# Altium PCB driver_lift_pcb.PcbDoc (part 1 of 2)
Units mm, origin at the board's own origin, x right, y up, seen from the top; angles counter-clockwise.
Board outline 100.2 x 76.58 mm, 2 copper layers (Top Layer, Bottom Layer); 113 components, 100 nets, 427 pads, 166 vias.
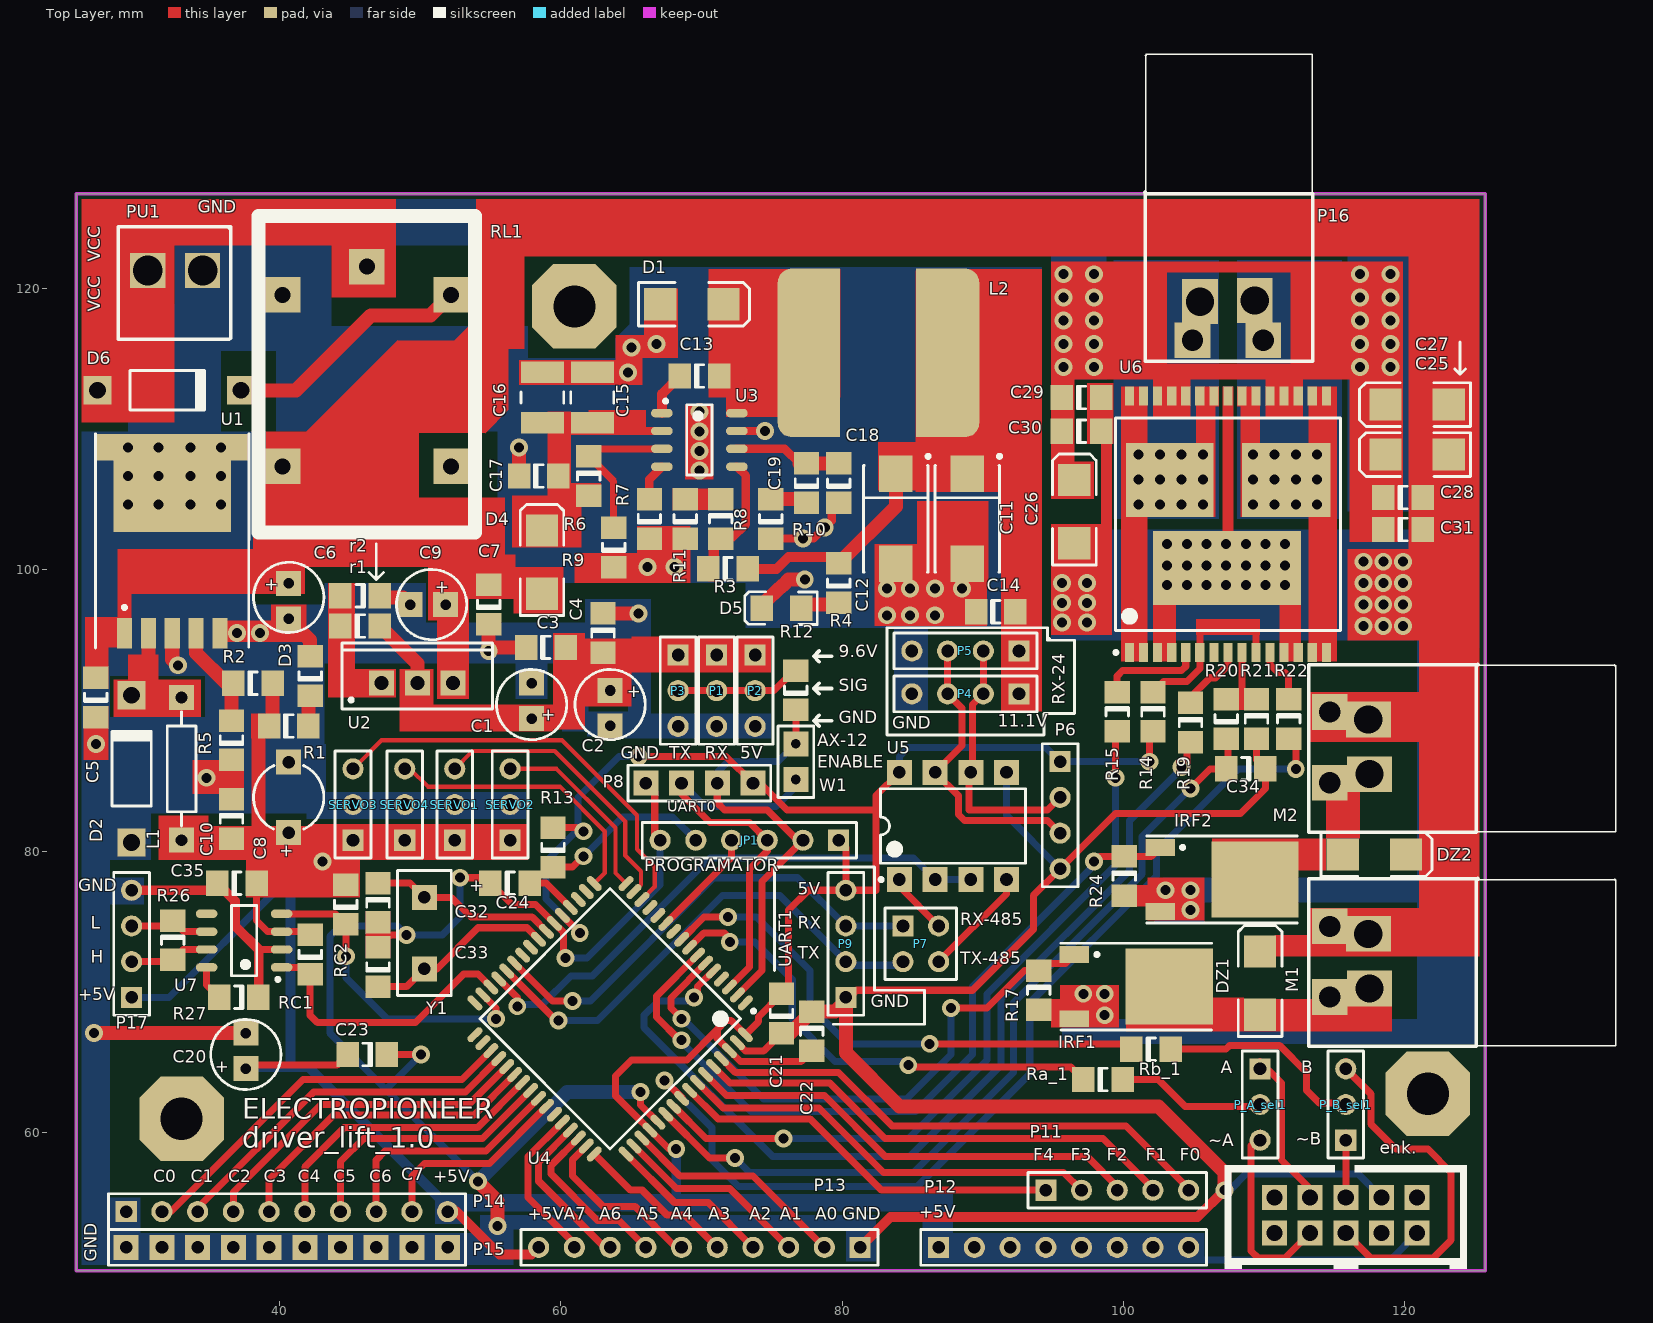
[diagram p0: Top Layer view]
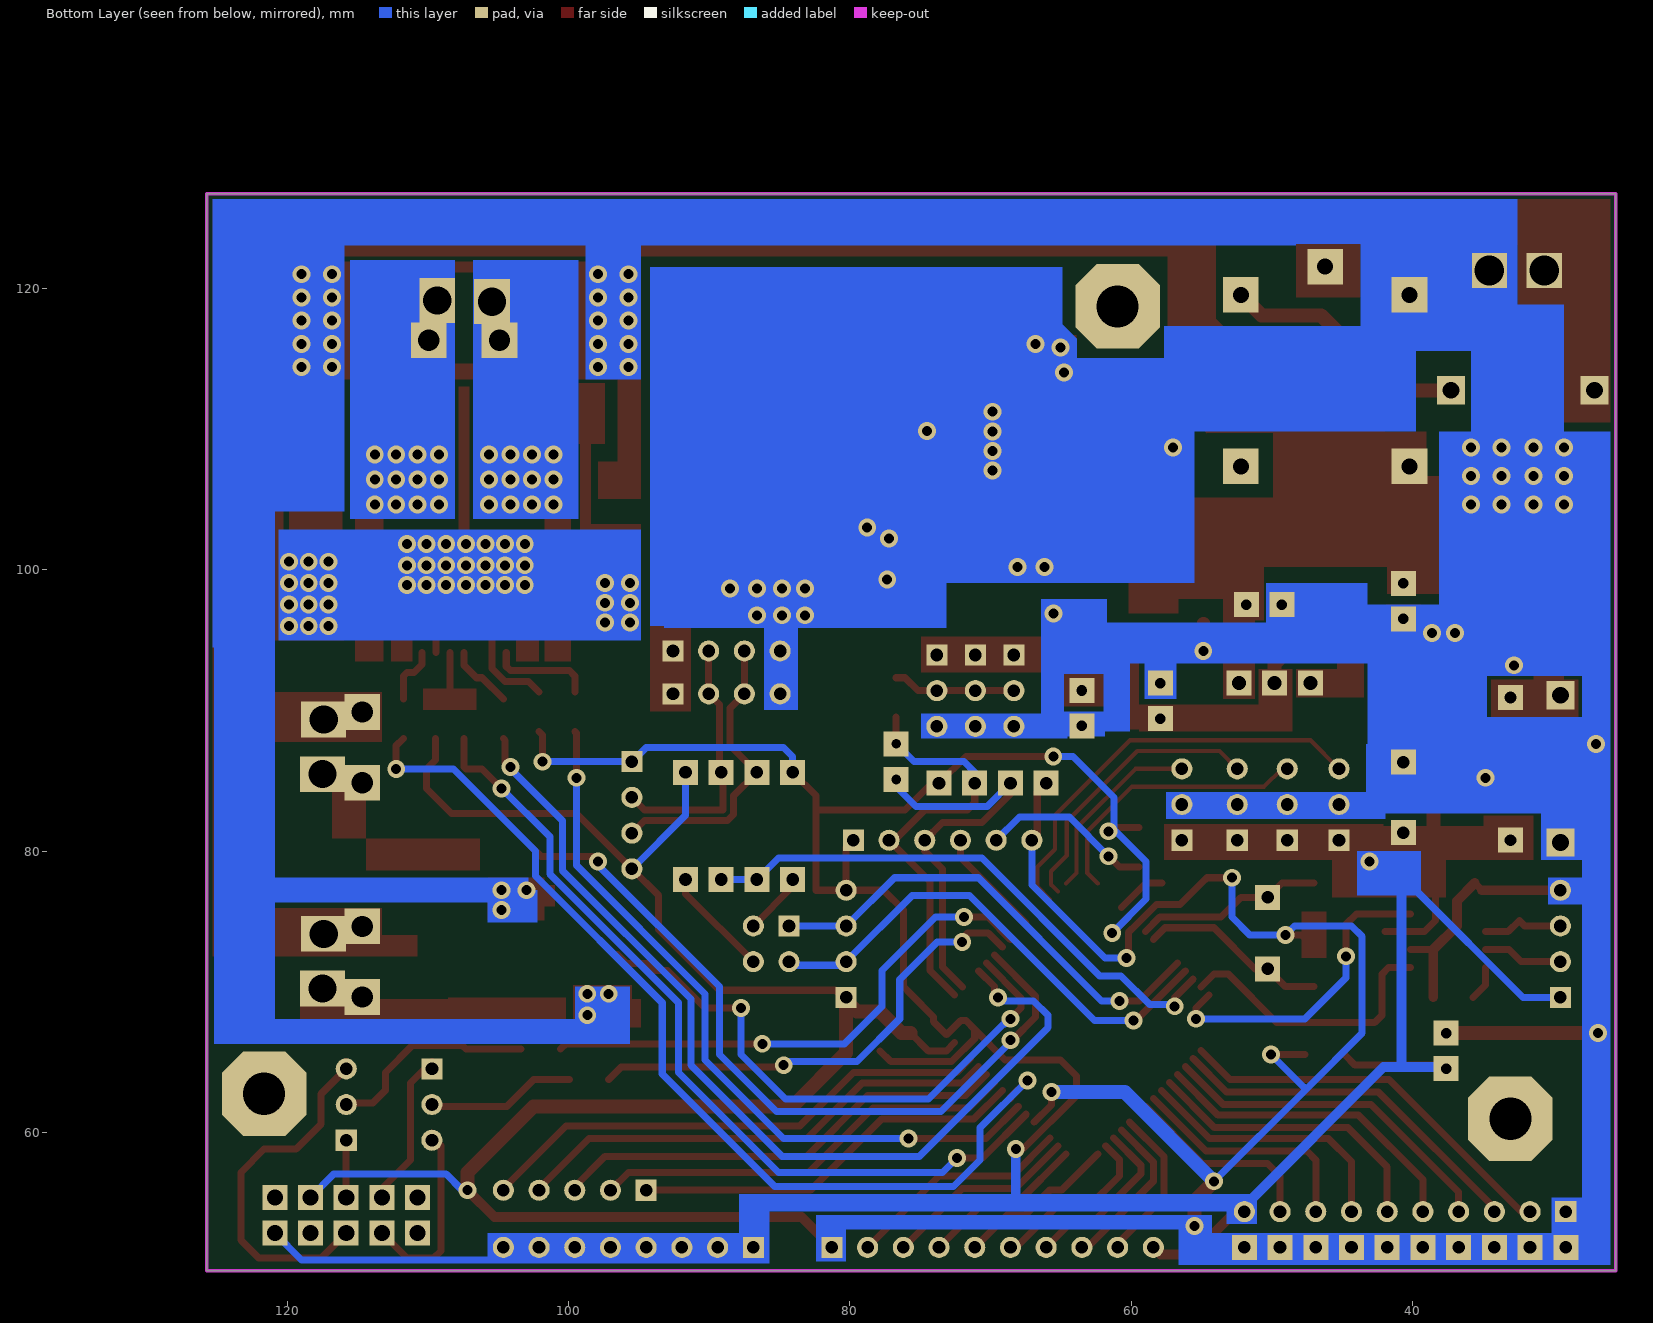
[diagram p1: Bottom Layer view, seen from below]

## Layer stack, top to bottom
Top Layer: signal copper 0.0356
Dielectric: dielectric 0.32, FR-4, Dk 4.8
Bottom Layer: signal copper 0.0356

## Board outline
25.527,50.165 125.73,50.165 125.73,126.746 25.527,126.746

## Design rules (kind name [scope] priority, off if disabled: settings)
Clearance [All] p1: gap=0.254
ComponentClearance [All] p1 off: gap=0.254 collisioncheckmode=3 verticalgap=0.254 showdistances=FALSE
DiffPairsRouting [All] p1: maxlimit=0.254 minlimit=0.254 mostfreqgap=0.254 maxuncoupledlength=12.7
Height [All] p1 off: minheight=0 maxheight=25.4 prefheight=12.7
HoleSize [All] p1: absolutevalues=TRUE maxlimit=5 minlimit=0.025 maxpercent=80.000 minpercent=20.000
HoleToHoleClearance [All] p1: gap=0.1 allowstackedmicrovias=TRUE
MinimumSolderMaskSliver [All] p1: minsoldermaskwidth=0.05
PasteMaskExpansion [All] p1 off: expansion=0
PlaneConnect [All] p1: planeconnectstyle=Direct reliefexpansion=0.508 reliefentries=4 reliefconductorwidth=0.254 reliefairgap=0.254
PolygonConnect [All] p1: connectstyle=Direct reliefconductorwidth=0.254 reliefentries=4 polygonreliefangle="90 Angle"
RoutingVias [All] p1: holewidth=0.711 width=1.27 viastyle="Through Hole" minholewidth=0.711 minwidth=1.27 maxholewidth=0.711 maxwidth=1.27
SilkToSilkClearance [All] p1 off: silktosilkclearance=0.254
SilkscreenOverComponentPads [All] p1 off: minsilkscreentomaskgap=0.254
SolderMaskExpansion [All] p1 off: expansion=0.102
TestPointUsage [All] p1: valid=0 allowmultiple=FALSE
Testpoint [All] p1: side=3 testpointundercomponent=TRUE minsize=1.016 maxsize=2.54 preferedsize=1.524 minholesize=0 maxholesize=1.016 preferedholesize=0.813 testpointgrid=0.025 style=297 order=0-112345678
Width [All] p1: maxlimit=5 minlimit=0.254 preferedwidth=0.508
14 further rules are at their usual default settings.

## Classes and differential pairs
differential pair D: +D_P -D_N

## Components (designator, comment, footprint, x,y, rotation, side; value= is the part's Value field where it differs from the comment)
C1 "Cap Pol1" B 57.912,90.424 r90 top locked
C2 "Cap Pol1" B 63.5,90.424 r270 top locked
C3 "Cap" 1206 58.928,94.488 r0 top locked
C4 "Cap" 1206 62.992,95.504 r270 top locked
C5 "100nF" 1206 26.924,90.932 r90 top locked
C6 "100uF" B 40.64,98.044 r270 top locked
C7 "Cap" 1206 54.864,97.536 r90 top locked
C8 "470uF" CAPPR5-5x5 40.64,83.82 r90 top locked
C9 "100uF" B 50.8,97.536 r180 top locked
C10 "100nF" 1206 36.576,82.296 r270 top locked
C11 "CapTantalum" TC7343-2917 88.9,103.632 r270 top locked
C12 "Cap Pol2" TC7343-2917 83.82,103.632 r270 top locked
C13 "cap_smd1206" 1206_cap 69.85,113.792 r180 top locked
C14 "cap_smd1206" 1206_cap 90.932,97.028 r180 top locked
C15 "cap-smd1812" cap_smd1812 62.23,112.268 r270 top locked
C16 "cap-smd1812" cap_smd1812 58.674,112.268 r270 top locked
C17 "100nF" 1206_cap 58.42,106.68 r180 top locked
C18 "cap_smd1206" 1206_cap 79.756,106.172 r270 top locked
C19 "cap_smd1206" 1206_cap 74.93,103.632 r270 top locked
C20 "100uF" B 37.592,65.532 r90 top locked
C21 "100nF" 1206 75.692,68.453 r90 top locked
C22 "100nF" 1206 77.851,67.183 r270 top locked
C23 "100nF" 1206 46.228,65.532 r180 top locked
C24 "2.2uF" 1206 56.388,77.724 r0 top locked
C25 "ZA MOST1" DSO-C2/X2.3 120.904,108.204 r180 top locked
C26 "ZA MOST1" DSO-C2/X2.3 96.52,104.14 r90 top locked
C27 "ZA MOST1" DSO-C2/X2.3 120.904,111.76 r180 top locked
C28 "Cap" 1206 119.888,105.156 r0 top locked
C29 "Cap" 1206 97.028,112.268 r0 top locked
C30 "Cap" 1206 97.028,109.855 r0 top
C31 "Cap" 1206 119.888,102.87 r0 top
C32 "33pF" 1206 46.99,76.327 r270 top locked
C33 "33pF" 1206 46.99,71.755 r90 top locked
C34 "Cap" 1206 108.712,85.852 r180 top locked
C35 "100nF" 1206 36.957,77.724 r0 top locked
D1 "B360B-13-F" DSO-C2/X3.3 69.342,118.872 r180 top locked
D2 "Diode Shottky" DO-41#1 29.464,85.852 r90 top locked
D3 "LED3" 1206 42.164,92.456 r90 top locked
D4 "B360B-13-F" DSO-C2/X3.3 58.674,100.584 r270 top locked
D5 "LEDsmd" led1206 75.692,97.282 r0 top locked
D6 "1N4007" DO-41#2 32.004,112.776 r0 top locked
DZ1 "STTH2R06U" DSO-C2/X2.3 109.728,70.612 r90 top locked
DZ2 "STTH2R06U" DSO-C2/X2.3 117.856,79.756 r0 top locked
enk. "Header 5X2" box_header 120.904,55.372 r180 top locked (schematic designator P_maxon1)
IRF1 "LR7821 / IRLR120" TO252 96.52,72.644 r270 top locked
IRF2 "LR7821 / IRLR120" TO252 102.616,80.264 r270 top locked
JP1 "programator" HDR1X6 79.756,80.772 r180 top
L1 "Inductor" AXIAL-0.4 33.02,85.852 r270 top locked
L2 "Inductor_MSS1260" INDUCTOR_SS1260-103MLD 82.55,115.824 r180 top locked
M1 "PREKIDAC_02" kombinacija 116.84,72.136 r90 top locked
M2 "PREKIDAC_02" kombinacija 116.84,87.376 r90 top locked
P1 "servo1" HDR1X3 71.074,93.953 r270 top locked
P2 "servo2" HDR1X3 73.814,93.953 r270 top locked
P3 "servo3" HDR1X3 68.334,93.953 r270 top locked
P4 "servo1" HDR1X4#1 92.583,91.186 r180 top locked
P5 "servo2" HDR1X4#1 92.583,94.234 r180 top locked
P6 "RS-485" HDR1X4#1 95.504,86.36 r270 top locked
P7 "Header 2X2" HDR2X2 84.328,74.676 r270 top locked
P8 "UART0" HDR1X4#2 66.04,84.836 r0 top locked
P9 "UART1" HDR1X4#1 80.264,69.596 r90 top locked
P11 "Header 5" HDR1X5 94.488,55.88 r0 top locked
P12 "Header 8" HDR1X8 86.868,51.816 r0 top locked
P13 "Header 10" HDR1X10#1 81.28,51.816 r180 top locked
P14 "Header 10" HDR1X10#1 29.083,54.356 r0 top locked
P15 "Header 10" HDR1X10#2 51.943,51.816 r180 top locked
P16 "MOTOR1" kombinacija 107.442,118.491 r180 top locked
P17 "CANBUS" HDR1X4#1 29.464,69.596 r90 top locked
P_A_sel1 "Header 3" HDR1X3 109.728,64.516 r270 top locked
P_B_sel1 "Header 3" HDR1X3 115.824,59.436 r90 top locked
PU1 "Header 2" kon-zakacaljkax2 32.512,120.396 r0 top locked
R1 "1k" 1206 40.64,88.9 r0 top locked
r1 "Res1" 1206 45.72,96.012 r0 top locked
R2 "8k2" 1206 38.1,91.948 r0 top locked
r2 "Res1" 1206 45.72,98.171 r180 top locked
R3 "res" 1206_res 71.882,100.076 r180 top locked
R4 "res" 1206_res 79.756,99.06 r270 top locked
R5 "2k7" 1206 36.576,87.884 r90 top locked
R6 "res" 1206_res 61.976,106.68 r90 top locked
R7 "res" 1206_res 66.294,103.632 r270 top locked
R8 "res" 1206_res 71.374,103.632 r90 top locked
R9 "res" 1206_res 63.754,101.6 r270 top locked
R10 "res" 1206_res 77.47,106.172 r270 top locked
R11 "res" 1206_res 68.834,103.632 r270 top locked
R12 "Res2" 1206 76.708,91.44 r90 top locked
R13 "33k" 1206 59.436,80.264 r90 top locked
R14 "res" 1206 102.108,89.916 r270 top locked
R15 "res" 1206 99.568,89.916 r270 top locked
R17 "Res2" 1206 93.98,70.104 r270 top locked
R19 "res" 1206 104.775,89.154 r270 top locked
R20 "res" 1206 107.315,89.408 r90 top locked
R21 "res" 1206 109.474,89.408 r270 top locked
R22 "res" 1206 111.76,89.408 r270 top locked
R24 "Res2" 1206 100.076,78.232 r270 top locked
R26 "termination" 1206 32.385,73.66 r270 top locked
R27 "50k" 1206 37.084,69.596 r180 top locked
Ra_1 "1k" 1206 98.552,63.754 r0 top locked
Rb_1 "1k" 1206 101.981,65.913 r0 top
RC1 "1K" 1206 42.164,72.644 r90 top locked
RC2 "1k" 1206 44.704,76.2 r90 top locked
RL1 "Relay_1" "RELEJ SMRDLJIVI" 31.496,137.668 r270 top locked
SERVO1 "Header 3" HDR1X3 52.451,80.772 r90 top locked
SERVO2 "Header 3" HDR1X3 56.388,80.772 r90 top locked
SERVO3 "Header 3" HDR1X3 45.212,80.772 r90 top locked
SERVO4 "Header 3" HDR1X3 48.895,80.772 r90 top locked
U1 "LM2575HVT-ADJ" TO-263(5) 28.956,95.504 r0 top locked
U2 "LM350T" T03B 49.784,91.948 r0 top locked
U3 "TPS54340" SOIC_8PIN 69.85,109.22 r90 top locked
U4 "AT90CAN128-16AU" TQFP80P1600X1600X110-64L 63.5,68.072 r225 top locked
U5 "MAX485EPA" DIP-8 87.884,81.788 r90 top locked
U6 "VNH2SP30-E" vnh_test1 107.442,103.251 r90 top locked
U7 "MCP2551-I/P" SOIC_8PIN 37.465,73.66 r270 top locked
W1 "Jumper" RAD-0.1 76.708,86.36 r270 top locked
Y1 "11.059200MHz" RAD-0.2 50.292,74.168 r90 top locked

## Footprints (in the part's own frame and the unit in brackets; to place one, negate y for a bottom-side part, rotate by r counter-clockwise, add the part's x,y. Pads: shape width x height; smd on the part's side, far side on the other; paste and mask are expansions set on the pad)
1206 [mm]
  rect 1.6x1.8 smd: 1(-1.4,0) 2(1.4,0)
  silkscreen extent -0.3,-0.8 0.3,0.8
1206_cap [mm]
  rect 1.6x1.8 smd: 1(1.4,0) 2(-1.4,0)
  silkscreen extent -0.3,-0.8 0.3,0.8, body extent -1.65,-0.81 1.55,0.79, height 1
1206_res [mm]
  rect 1.6x1.8 smd: 1(1.4,0) 2(-1.4,0)
  silkscreen extent -0.3,-0.8 0.3,0.8, body extent -1.63,-0.81 1.57,0.79, height 0.55
AXIAL-0.4 [mil]
  rect 70x70 hole 33.46: 1(-200,0) 2(200,0)
  silkscreen extent -160,-40 160,40
B [mil]
  rect 70x70 hole 29.53: 1(-39.37,0) 2(60,0)
  silkscreen extent -98,-98 98,98
box_header [mil]
  rect 70x70 hole 45: 1(400,100) 2(400,0) 3(300,100) 4(300,0) 5(200,100) 6(200,0) 7(100,100) 8(100,0) 9(0,100) 10(0,0)
  silkscreen extent -140,-90 540,200
cap_smd1812 [mil]
  rect 60x120 smd: 1(71.02,1) 2(-71.02,1)
  silkscreen extent -16,-60 16,60, body extent -89,-62 88,64, height 40
CAPPR5-5x5 [mil]
  rect 70x70 hole 35: 1(-98.43,0) 2(98.43,0)
  silkscreen extent -89,-98 89,98
DIP-8 [mil]
  rect 70x70 hole 35.43: 1(-150,150) 2(-150,50) 3(-150,-50) 4(-150,-150) 5(150,-150) 6(150,-50) 7(150,50) 8(150,150)
  silkscreen extent -155,-203 104,206, body extent -142,-203 142,203, height 200
DO-41#1 [mm]
  rect 2x2 hole 1.2: 1(-5.23,0) 2(5.23,0)
  silkscreen extent -2.65,-1.4 2.75,1.4
DO-41#2 [mm]
  rect 2x2 hole 1.2: 1(-4.953,0) 2(5.23,0)
  silkscreen extent -2.65,-1.4 2.75,1.42
DSO-C2/X2.3 [mm]
  rect 2.3x2.3 smd: 1(-2.25,0) 2(2.25,0)
  silkscreen extent -3.8,-1.55 4.1,1.55
DSO-C2/X3.3 [mm]
  rect 2.3x2.3 smd: 1(2.275,-0.022) 2(-2.225,-0.022)
  silkscreen extent -4.07,-1.57 3.83,1.53, body extent -2.72,-2.03 2.78,1.87, height 2.45
HDR1X3 [mm] "Connector; Header; 3 Position"
  rect 1.5x1.5 hole 0.9: 1(0,0)
  round 1.5 hole 0.9: 2(2.54,0) 3(5.08,0)
  silkscreen extent -1.27,-1.27 6.35,1.27
HDR1X4#1 [mm] "Connector; Header; 4 Position"
  rect 1.5x1.5 hole 0.9: 1(0,0)
  round 1.5 hole 0.9: 2(2.54,0) 3(5.08,0) 4(7.62,0)
  silkscreen extent -1.27,-1.27 8.89,1.27
HDR1X4#2 [mm]
  rect 1.778x1.778 hole 0.9: 1(0,0) 2(2.54,0) 3(5.08,0) 4(7.62,0)
  silkscreen extent -1.27,-1.27 8.89,1.27
HDR1X5 [mm] "Connector; Header; 5 Position"
  rect 1.5x1.5 hole 0.9: 1(0,0)
  round 1.5 hole 0.9: 2(2.54,0) 3(5.08,0) 4(7.62,0) 5(10.16,0)
  silkscreen extent -1.27,-1.27 11.43,1.27
HDR1X6 [mm] "Connector; Header; 6 Position"
  rect 1.5x1.5 hole 0.9: 1(0,0)
  round 1.5 hole 0.9: 2(2.54,0) 3(5.08,0) 4(7.62,0) 5(10.16,0) 6(12.7,0)
  silkscreen extent -1.27,-1.27 13.97,1.27
HDR1X8 [mm] "Connector; Header; 8 Position"
  rect 1.5x1.5 hole 0.9: 1(0,0)
  round 1.5 hole 0.9: 2(2.54,0) 3(5.08,0) 4(7.62,0) 5(10.16,0) 6(12.7,0) 7(15.24,0) 8(17.78,0)
  silkscreen extent -1.27,-1.27 19.05,1.27
HDR1X10#1 [mm] "Connector; Header; 10 Position"
  rect 1.5x1.5 hole 0.9: 1(0,0)
  round 1.5 hole 0.9: 2(2.54,0) 3(5.08,0) 4(7.62,0) 5(10.16,0) 6(12.7,0) 7(15.24,0) 8(17.78,0) 9(20.32,0) 10(22.86,0)
  silkscreen extent -1.27,-1.27 24.13,1.27
HDR1X10#2 [mm]
  rect 1.778x1.778 hole 0.9: 1(0,0) 2(2.54,0) 3(5.08,0) 4(7.62,0) 5(10.16,0) 6(12.7,0) 7(15.24,0) 8(17.78,0) 9(20.32,0) 10(22.86,0)
  silkscreen extent -1.27,-1.27 24.13,1.27
HDR2X2 [mm] "Connector; Header; 2x2 Position"
  rect 1.5x1.5 hole 0.9: 1(0,0)
  round 1.5 hole 0.9: 2(0,2.54) 3(2.54,0) 4(2.54,2.54)
  silkscreen extent -1.27,-1.27 3.81,3.81
INDUCTOR_SS1260-103MLD [mil]
  rect 75x472.44 smd: 1(144,15) 2(-144,15)
  rrect50% 157.48x472.44 smd: 1(202,15) 2(-205,15)
  body extent -247,-231 245,261, height 315
kombinacija [mil]
  rect 100x100 hole 59.06: 1(-99,85) 2(99,85)
  rect 100x125.98 hole 78.74: 1(-75,-26) 2(78,-23)
  silkscreen extent -237,-716 233,144
kon-zakacaljkax2 [mm]
  rect 2.5x2.5 hole 2.1: 1(-1.9,0.9) 2(2,0.9)
  silkscreen extent -4,-4 4,4
led1206 [mm]
  rect 1.6x1.8 smd: 1(1.4,0) 2(-1.4,0)
  silkscreen extent -2.62,-1.17 2.54,1.17, body extent -1.6,-0.79 1.6,0.81, height 1.11
RAD-0.1 [mil]
  rect 70x70 hole 27.56: 1(-50,0) 2(50,0)
  silkscreen extent -100,-50 100,50
RAD-0.2 [mil]
  rect 70x70 hole 35: 1(-100,0) 2(100,0)
  silkscreen extent -175,-75 175,75
"RELEJ SMRDLJIVI" [mm]
  rect 2.54x2.54 hole 1.143: 1(16.1,14.7) 2(30.3,8.7) 3(30.3,20.7) 4(18.1,20.7) 5(18.1,8.7)
  silkscreen extent 12.5,7 35,22.4
SOIC_8PIN [mil]
  oval 23.62x60.61 smd: 1(76,105) 2(26,105) 3(-24,105) 4(-74,105) 5(-74,-105) 6(-24,-105) 7(26,-105) 8(76,-105)
  silkscreen extent -97,-35 114,99, body extent -96,-123 97,113, height 69
T03B [mil]
  rect 70x70 hole 39.37: 1(-100,0) 2(0,0) 3(100,0)
  silkscreen extent -211,-73 211,112, body extent -213,-75 213,114, height 764
TC7343-2917 [mm]
  rect 2.6x2.4 smd: 1(-3.2,0) 2(3.2,0)
  silkscreen extent -4.57,-2.3 3.8,2.43, body extent -3.18,-1.63 3.01,1.58, height 2.68
TO252 [mm]
  rect 1.2x2.1 smd: 1(0,0) 3(4.57,0)
  rect 5.4x6.2 smd: 4(2.285,6.75)
  silkscreen extent -0.8,-0.95 5.37,9.75, body extent -0.98,-0.64 5.56,9.3, height 2.29
TO-263(5) [mm]
  rect 1.07x2.16 smd: 1(0,0) 2(1.7,0) 3(3.4,0) 4(5.1,0) 5(6.8,0)
  rect 8.33x6.99 smd: 3(3.4,10.675)
  rect 10.8x1.91 smd: 3(3.4,13.215)
  silkscreen extent -2.06,-1.05 8.85,14.18
TQFP80P1600X1600X110-64L [mm] "TQFP, 64-Leads, Body 16.0x16.0mm (max), Pitch 0.80mm, IPC High Density"
  oval 1.3x0.5 smd: 1(-7.6,6) 2(-7.6,5.2) 3(-7.6,4.4) 4(-7.6,3.6) 5(-7.6,2.8) 6(-7.6,2) 7(-7.6,1.2) 8(-7.6,0.4) 9(-7.6,-0.4) 10(-7.6,-1.2) 11(-7.6,-2) 12(-7.6,-2.8) 13(-7.6,-3.6) 14(-7.6,-4.4) 15(-7.6,-5.2) 16(-7.6,-6) 33(7.6,-6) 34(7.6,-5.2) 35(7.6,-4.4) 36(7.6,-3.6) 37(7.6,-2.8) 38(7.6,-2) 39(7.6,-1.2) 40(7.6,-0.4) 41(7.6,0.4) 42(7.6,1.2) 43(7.6,2) 44(7.6,2.8) 45(7.6,3.6) 46(7.6,4.4) 47(7.6,5.2) 48(7.6,6)
  oval 0.5x1.3 smd: 17(-6,-7.6) 18(-5.2,-7.6) 19(-4.4,-7.6) 20(-3.6,-7.6) 21(-2.8,-7.6) 22(-2,-7.6) 23(-1.2,-7.6) 24(-0.4,-7.6) 25(0.4,-7.6) 26(1.2,-7.6) 27(2,-7.6) 28(2.8,-7.6) 29(3.6,-7.6) 30(4.4,-7.6) 31(5.2,-7.6) 32(6,-7.6) 49(6,7.6) 50(5.2,7.6) 51(4.4,7.6) 52(3.6,7.6) 53(2.8,7.6) 54(2,7.6) 55(1.2,7.6) 56(0.4,7.6) 57(-0.4,7.6) 58(-1.2,7.6) 59(-2,7.6) 60(-2.8,7.6) 61(-3.6,7.6) 62(-4.4,7.6) 63(-5.2,7.6) 64(-6,7.6)
  silkscreen extent -7.72,-6.55 6.55,6.95, body extent -7,-7 7,7, height 1.1
vnh_test1 [mm]
  rect 1.35x0.65 smd: 1(-9.125,7) 2(-9.125,6) 3(-9.125,5) 4(-9.125,4) 5(-9.125,3) 6(-9.125,2) 7(-9.125,1) 8(-9.125,0) 9(-9.125,-1) 10(-9.125,-2) 11(-9.125,-3) 12(-9.125,-4) 13(-9.125,-5) 14(-9.125,-6) 15(-9.125,-7) 16(9.125,-7) 17(9.125,-6) 18(9.125,-5) 19(9.125,-4) 20(9.125,-3) 21(9.125,-2) 22(9.125,-1) 23(9.125,0) 24(9.125,1) 25(9.125,2) 26(9.125,3) 27(9.125,4) 28(9.125,5) 29(9.125,6) 30(9.125,7)
  rect 5.25x10.5 smd: 31(-3.117,0.064)
  rect 5.26x6.23 smd: 32(3.146,4.133)
  rect 5.25x6.3 smd: 33(3.144,-4.156)
  silkscreen extent -9.25,-8 7.55,8.1

## Part data
C1 C2 C11: "Polarized Capacitor (Radial)"
C3 C4 C7 C13 C14 C18 C19 C28 C29 C30 C31 C34: "Capacitor"
C5 C10 C21 C22 C23 C24 C32 C33 C35: library part Cap, "Capacitor"
C6 C8 C9 C20 C25 C26 C27: library part "Cap Pol1", "Polarized Capacitor (Radial)"
C12 C15 C16: "Polarized Capacitor (Axial)"
C17: library part cap_smd, "Capacitor"
D1 D4: library part SCHOTTKY_RECTIFIER_diode_SMB, "Schottky Rectifier"
D2 D6: library part "Diode 1N4007", "1 Amp General Purpose Rectifier"
D3: "Typical BLUE SiC LED"
D5: "Typical INFRARED GaAs LED"
DZ1 DZ2: library part Diode, "Default Diode"
enk.: "Header, 5-Pin, Dual row"
IRF1 IRF2: library part IRLR120, "HEXFET N-Channel Power MOSFET"
JP1: library part "Header 6", "Header, 6-Pin"
L2: "Magnetic-Core Inductor"
M1 M2 P16: library part "Header 2", "Header, 2-Pin"
P1 P2 P3: library part "Header 3", "Header, 3-Pin"
P4 P5 P6 P8 P9 P17: library part "Header 4", "Header, 4-Pin"
P7: "Header, 2-Pin, Dual row"
P11: "Header, 5-Pin"
P12: "Header, 8-Pin"
P13 P14 P15: "Header, 10-Pin"
P_A_sel1 P_B_sel1 SERVO1 SERVO2 SERVO3 SERVO4: "Header, 3-Pin"
PU1: "Header, 2-Pin"
R1 R2 R5 R13 R26 R27 RC1 RC2: library part Res2, "Resistor"
r1 r2 R3 R4 R6 R7 R8 R9 R10 R11 R12 R17 R24: "Resistor"
R14 R15 R19 R20 R21 R22: library part Res1, "Resistor"
Ra_1 Rb_1: library part RES1
U1: "Simple Switcher 1A Step Down Voltage Regulator"
U2: "3-Amp Adjustable Regulator"
U3: "Buck Step Down Regulator with 5.5 to 36 V Input and 1.23 to 31 V Output, -40 to 125 degC, 8-Pin SOIC (D), Green (RoHS & no Sb/Br)"
U4: "8-bit AVR Microcontroller, 128KB Flash and CAN Controller, 53 GPIO pins, Industrial Grade (-40° to +85°C), 64-pin LQFP, Green"
U5: "Low-Power, Slew-Rate-Limited RS-485/RS-422 Transceiver"
U7: "High Speed CAN Transceiver, 8-Pin Plastic DIP, Industrial Grade"
W1: "Jumper Wire"
Y1: library part XTAL, "Crystal Oscillator"

## Free pads (board coordinates)
  oct 6x6 hole 3: 0(33.02,60.96) 0(60.96,118.745) 0(121.666,62.738)

## Via types
v1: diameter 1.27, hole 0.711, Top Layer to Bottom Layer, tented both sides, 166 vias

## Nets (pads, with @x,y where several pads share a name; then routed paths per layer and width w, separated by ;. In a path a pad name is that pad's centre, name@x,y a point inside that pad or via, vN(x,y) a via of type N, cw(c..) or ccw(c..) an arc to the next point about the centre after c; other vN are vias at no path point)
+5: C8.1 C10.2 C20.1 C21.2 C22.2 C23.2 C35.2 enk..9 JP1.1 L1.2 P6.1 P8.4 P9.4 P12.1 P12.2 P12.3 P12.4 P12.5 P12.6 P12.7 P12.8 P13.10 P14.10 P17.1 R1.1 R2.2 R13.2 R14.2 RC1.2 RC2.2 SERVO1.1 SERVO2.1 SERVO3.1 SERVO4.1 U4.21 U4.52 U4.62 U4.64 U5.8 U7.3 | length 219.4
  Top Layer w0.5: C20.1@37.592,64.532 37.83,64.77 44.066,64.77 C23.2@44.828,65.532 ; C35.2@38.357,77.724 38.357,75.054 39.141,74.27 U7.3@40.132,74.27 RC1.2@41.938,74.27 ; R13.2@59.941,81.664 R13.2@59.436,81.664 61.084,81.664 61.341,81.407 v1(61.595,81.407) ; U4.21@60.106,75.426 60.106,75.403 v1(61.341,74.168) ; v1(65.532,86.741) 71.755,86.741 P8.4@73.66,84.836 74.168,84.836 76.073,82.931 82.423,82.931 ; v1(68.199,58.801) 67.68,58.801 63.881,62.6 63.881,64.008 65.024,65.151 68.961,65.151 71.12,67.31 ; C22.2@77.851,65.783 77.092,65.024 72.771,65.024 71.12,66.675 71.12,67.31 ; JP1.1@79.756,80.772 80.264,80.264 P9.4@80.264,77.216 ; U5.8@84.074,85.598 82.423,83.947 82.423,82.931 ; v1(101.854,86.36) 101.854,88.262 R14.2@102.108,88.516 ; 71.12,67.31 71.755,67.945 72.112,67.945 U4.64@73.117,66.941 74.041,67.865 74.041,68.202 C21.2@75.692,69.853 76.2,70.361 76.2,75.819 77.597,77.216 P9.4@80.264,77.216 ; P9.4@80.264,77.216 82.423,77.216 82.423,82.931
  Top Layer w0.7: P14.10@51.943,54.356 52.578,54.356 55.626,51.308 57.912,51.308 P13.10@58.42,51.816
  Top Layer w1: 38.481,80.772 R1.1@38.481,88.9 ; R1.1@39.24,88.9 39.5,89.16 R2.2@39.5,91.948 R2.2@39.5,91.316
  Bottom Layer w0.5: P17.1@29.464,69.596 32.131,69.596 39.751,77.216 ; P14.10@51.943,54.356 P14.10@51.943,54.737 ; v1(61.341,74.168) 58.928,76.581 58.928,79.248 61.214,81.534 61.214,83.82 64.135,86.741 v1(65.532,86.741) ; U5.8@84.074,85.598 84.074,86.741 84.709,87.376 94.488,87.376 P6.1@95.504,86.36 v1(101.854,86.36) ; P12.8@104.648,51.816 105.537,50.927 118.999,50.927 enk..9@120.904,52.832
  Bottom Layer w0.7: C20.1@37.592,64.532 37.703,64.643 40.767,64.643 ; 40.64,77.597 40.767,77.47 40.767,64.643 ; P14.10@51.943,54.737 42.037,64.643 40.767,64.643 ; 68.199,54.991 v1(68.199,58.801)
  other v1: 43.053,79.248
+9.6V: C1.1 C2.1 C3.2 C4.2 P1.1 P2.1 P3.1 r1.2 U2.2 | length 5.2
  Top Layer w1: r1.2@47.12,96.012 49.784,93.348 U2.2@49.784,91.948
+12V: C5.2 C6.1 C7.2 C9.1 C25.1 C26.1 C27.1 C28.2 C29.2 C30.2 C31.2 D4.1 DZ1.2 DZ2.2 M1.2 M2.2 RL1.2 U1.1 U2.3 U6.3 U6.4 U6.12 U6.13 U6.23 U6.31 | length 21.9
  Top Layer w1: U1.1@28.956,95.504 28.956,99.441 29.591,100.076 37.719,100.076 38.608,100.965 38.608,104.256 41.72,107.368
  other v1: 117.094,96.012 118.491,96.012 119.888,96.012 95.631,96.266 97.409,96.266 117.094,97.536 118.491,97.536 119.888,97.536 95.631,97.663 97.409,97.663 103.124,98.933 104.521,98.933 105.918,98.933 107.315,98.933 108.712,98.933 110.109,98.933 111.506,98.933 95.631,99.06 97.409,99.06 117.094,99.06 118.491,99.06 119.888,99.06 103.124,100.33 104.521,100.33 105.918,100.33 107.315,100.33 108.712,100.33 110.109,100.33 111.506,100.33 117.094,100.584 118.491,100.584 119.888,100.584 103.124,101.854 104.521,101.854 105.918,101.854 107.315,101.854 108.712,101.854 110.109,101.854 111.506,101.854
A1: enk..4 P_A_sel1.1 | length 11.1
  Top Layer w0.5: P_A_sel1.1@109.728,65.024 111.252,63.5 111.252,58.039 113.284,56.007 enk..4@113.284,55.372
B1: enk..6 P_B_sel1.1 | length 4.6
  Top Layer w0.5: enk..6@115.824,55.372 P_B_sel1.1@115.824,59.944
CANH: P17.2 R26.2 U7.7 | length 5.7
  Top Layer w0.5: P17.2@29.464,72.136 32.261,72.136 R26.2@32.385,72.26 33.125,73 U7.7@34.798,73
CANL: P17.3 R26.1 U7.6 | length 5.8
  Top Layer w0.5: P17.3@29.464,74.676 32.001,74.676 R26.1@32.385,75.06 33.175,74.27 U7.6@34.798,74.27
D_N: P4.2 P5.2 P6.2 U5.6 | length 18.6
  Top Layer w0.5: P5.2@90.043,94.234 P4.2@90.043,91.186 89.281,90.424 89.281,85.725 U5.6@89.154,85.598 89.027,85.471 89.027,82.927 94.611,82.927 P6.2@95.504,83.82
D_P: P4.3 P5.3 P6.3 U5.7 | length 21.3
  Top Layer w0.5: P5.3@87.503,94.234 P4.3@87.503,91.186 88.527,90.162 88.527,87.511 U5.7@86.614,85.598 88.273,83.939 88.273,82.615 88.715,82.173 94.611,82.173 P6.3@95.504,81.28
GND: C1.2 C2.2 C3.1 C4.1 C5.1 C6.2 C7.1 C8.2 C9.2 C10.1 C11.2 C12.2 C14.1 C15.2 C16.2 C17.1 C18.1 C19.1 C20.2 C21.1 C22.1 C23.1 C24.1 C25.2 C26.2 C27.2 C28.1 C29.1 C30.1 C31.1 C32.2 C33.2 C34.1 C35.1 D1.1 D2.1 D3.2 D5.2 enk..8 IRF1.3 IRF2.3 JP1.6 P1.3 P2.3 P3.3 P4.4 P5.4 P6.4 P8.1 P9.1 P13.1 P14.1 P15.1 P15.2 P15.3 P15.4 P15.5 P15.6 P15.7 P15.8 P15.9 P15.10 P17.4 PU1.2 r2.1 R5.1 R7.1 R9.1 R11.1 R17.2 R21.2 R24.2 R27.1 RL1.5 SERVO1.2 SERVO2.2 SERVO3.2 SERVO4.2 U1.3 U1.5 U3.7 U4.22 U4.53 U4.63 U5.5 U6.18 U6.19 U6.20 U6.26 U6.27 U6.28 U7.2 | length 294.3
  Top Layer w0.5: C35.1@35.049,77.216 C35.1@35.557,77.724 ; R27.1@38.484,69.596 R27.1@38.506,69.618 ; 38.506,73 U7.2@40.132,73 ; C33.2@46.99,73.155 47.876,74.041 v1(49.022,74.041) ; C23.1@47.628,65.532 v1(50.038,65.532) ; v1(52.832,78.105) 54.607,78.105 C24.1@54.988,77.724 56.512,76.2 58.2,76.2 U4.22@59.54,74.86 60.198,74.202 60.198,72.517 v1(60.325,72.39) ; v1(65.659,62.865) 65.659,61.953 U4.53@66.894,60.718 ; P8.1@66.04,84.836 66.675,84.201 66.675,81.153 JP1.6@67.056,80.772 ; U4.63@72.551,66.375 73.14,65.786 74.425,65.786 C21.1@75.692,67.053 ; 80.267,67.691 P9.1@80.267,69.345 ; 80.391,67.948 P9.1@80.391,69.469 ; R21.2@109.474,88.008 109.474,86.49 C34.1@110.112,85.852 110.112,84.458 108.331,82.677 99.441,82.677 P6.4@95.504,78.74 93.599,76.835 93.599,74.422 89.281,70.104 81.026,70.104 P9.1@80.391,69.469 ; P9.1@80.267,69.345 80.264,69.342 P9.1@80.264,69.596 P9.1@80.267,69.593 ; P9.1@80.267,69.345 P9.1@80.267,69.593 ; P9.1@80.267,69.345 P9.1@80.391,69.469 ; P9.1@80.267,69.593 P9.1@80.391,69.469
  Top Layer w0.6: U3.7@72.517,109.88 74.168,109.88 v1(74.524,109.88) ; C19.1@74.93,102.232 v1(77.216,102.232) 77.975,102.232 v1(78.767,103.024) 79.248,103.505 C18.1@79.248,104.264
  Top Layer w0.7: P17.4@29.464,77.216 C35.1@35.049,77.216 ; C35.1@35.557,77.724 36.83,76.451 36.83,74.676 38.506,73 R27.1@38.506,69.618 ; P13.1@81.28,51.816 83.439,53.975 105.283,53.975 v1(107.188,55.88)
  Top Layer w1: v1(26.797,67.056) C20.2@37.592,67.056 ; U1.3@32.356,95.504 32.356,93.628 v1(32.766,93.218) ; C6.2@40.64,96.52 42.164,94.996 D3.2@42.164,93.856 ; r2.1@47.12,98.044 48.768,98.044 C9.2@49.276,97.536 ; v1(54.102,56.515) 55.499,55.118 v1(55.499,53.34) ; C7.1@54.864,96.136 54.864,94.488 C3.1@57.528,94.488 ; C17.1@57.02,106.553 v1@57.02,108.455 ; C4.1@62.992,96.904 v1(65.529,96.904) v1@65.532,96.901 ; D5.2@74.292,97.536 75.819,98.933 76.2,99.314 v1(77.343,99.314) ; C21.1@75.692,67.053 76.321,67.053 C22.1@77.851,68.583 79.505,68.583 80.264,69.342 80.264,65.659 84.074,61.849 102.489,61.849 107.188,57.15 v1(107.188,55.88)
  Bottom Layer w0.254: PU1.2@34.512,122.312 38.976,122.312 41.72,119.568
  Bottom Layer w0.5: v1(50.038,65.532) 47.688,63.182 47.619,63.182 47.527,63.09 ; v1(52.832,78.105) 52.832,75.311 51.562,74.041 v1(49.022,74.041) 48.387,74.676 44.323,74.676 43.561,73.914 43.561,67.056 47.527,63.09 ; v1(54.102,56.515) 47.527,63.09 ; v1(60.325,72.39) 61.849,72.39 67.056,77.597 JP1.6@67.056,80.772 ; U5.5@91.694,85.598 91.694,82.55 P6.4@95.504,78.74 ; v1(107.188,55.88) 107.569,55.88 108.712,57.023 116.713,57.023 enk..8@118.364,55.372
  Bottom Layer w1: v1(54.102,56.515) 60.452,62.865 v1(65.659,62.865)
  other v1: 98.679,68.326 97.155,69.85 98.679,69.85 104.775,75.819 102.997,77.216 104.775,77.216 34.798,85.217 26.924,87.63 54.864,94.234 36.957,95.504 38.608,95.504 83.185,96.774 84.836,96.774 86.614,96.774 83.185,98.679 84.836,98.679 86.614,98.679 88.519,98.679 66.167,100.203 68.072,100.203 29.21,104.648 31.369,104.648 33.655,104.648 35.814,104.648 29.21,106.68 31.369,106.68 33.655,106.68 35.814,106.68 69.85,107.061 69.85,108.458 29.21,108.712 31.369,108.712 33.655,108.712 35.814,108.712 57.023,108.712 69.85,109.855 69.85,111.252 64.77,114.046 95.758,114.427 97.917,114.427 116.84,114.427 118.999,114.427 65.024,115.824 66.802,116.078 95.758,116.078 97.917,116.078 116.84,116.078 118.999,116.078 95.758,117.729 97.917,117.729 116.84,117.729 118.999,117.729 95.758,119.38 97.917,119.38 116.84,119.38 118.999,119.38 95.758,121.031 97.917,121.031 116.84,121.031 118.999,121.031
NetC13_1: C13.1 U3.1 | length 3.2
  Top Layer w0.7: U3.1@67.183,111.15 67.183,112.525 C13.1@68.45,113.792
NetC13_2: C13.2 D1.2 L2.1 U3.8 | length 1.8
  Top Layer w0.7: C13.2@71.25,113.792 72.517,112.525
NetC15_1: C15.1 C16.1 C17.2 D4.2 R6.2 U3.2 | length 6.5
  Top Layer w0.6: C15.1@60.731,109.88 U3.2@67.183,109.88
NetC18_2: C18.2 R10.2 U3.6 | length 7.7
  Top Layer w0.6: U3.6@72.517,108.61 75.921,108.61 R10.2@76.959,107.572
  Top Layer w1: R10.2@76.959,107.572 R10.2@77.47,107.572 C18.2@79.756,107.572
NetC19_2: C19.2 R10.1 | length 2.6
  Top Layer w1: C19.2@74.93,105.032 77.21,105.032 R10.1@77.47,104.772
NetD2_2: D2.2 L1.1 U1.2 | length 4.2
  Top Layer w1: 30.607,91.313 30.607,93.659 30.656,93.708 U1.2@30.656,95.504
NetD3_1: D3.1 R1.2 | length 2.2
  Top Layer w1: R1.2@42.04,88.9 42.04,90.932 D3.1@42.164,91.056
NetD5_1: D5.1 R4.1 | length 2.5
  Top Layer w1: D5.1@77.092,97.536 R4.1@79.632,97.536
NetD6_1: D6.1 PU1.1 RL1.1 | length 34.1
  Top Layer w0.254: D6.1@27.282,112.776 30.612,116.106 30.612,122.312 30.612,124.846 47.874,124.846 47.874,121.722 47.72,121.568
NetD6_2: D6.2 RL1.4 | length 17.3
  Top Layer w1: D6.2@37.742,112.776 41.148,112.776 46.482,118.11 50.738,118.11 RL1.4@52.196,119.568
NetDZ1_1: DZ1.1 IRF1.4 M1.1
NetDZ2_1: DZ2.1 IRF2.4 M2.1
NetP1_2: P1.2 P2.2 P3.2 R12.2 | length 8.8
  Top Layer w0.5: P3.2@68.334,91.413 P1.2@71.074,91.413 P2.2@73.814,91.413 75.157,91.413 76.073,92.329 R12.2@76.708,92.329
NetP7_2: P7.2 U5.1 | length 4.5
  Top Layer w0.5: U5.1@84.074,77.978 84.074,77.47 P7.2@86.868,74.676
NetP7_4: P7.4 U5.4 | length 7.8
  Top Layer w0.5: P7.4@86.868,72.136 91.694,76.962 U5.4@91.694,77.978
NetP_A_sel1_2: P_A_sel1.2 Ra_1.2 | length 10.8
  Top Layer w0.5: Ra_1.2@99.952,63.754 102.489,63.754 104.394,61.849 106.048,61.849 109.093,61.849 P_A_sel1.2@109.728,62.484
NetP_B_sel1_2: P_B_sel1.2 Rb_1.2 | length 15.1
  Top Layer w0.5: Rb_1.2@103.381,65.913 107.315,65.913 107.569,66.167 111.125,66.167 113.03,64.262 113.03,62.989 113.919,62.1 115.44,62.1 P_B_sel1.2@115.824,62.484
Netr1_1: r1.1 r2.2 U2.1 | length 2
  Top Layer w0.5: r1.1@44.32,96.012 r2.2@44.32,98.044
NetR2_1: R2.1 R5.2 U1.4 | length 7.7
  Top Layer w1: U1.4@34.056,95.504 34.056,94.087 36.195,91.948 R2.1@36.7,91.948 36.576,91.824 R5.2@36.576,89.284
NetR3_1: R3.1 R8.2 U3.5 | length 6.6
  Top Layer w0.6: R8.2@71.374,102.232 72.133,102.232 73.152,103.251 73.152,106.705 U3.5@72.517,107.34
NetR6_1: R6.1 R9.2 U3.3 | length 11.2
  Top Layer w0.5: R9.2@63.754,103 63.754,106.302 R6.1@61.976,108.08 62.481,108.585 67.158,108.585 U3.3@67.183,108.61